# EAGLE board pannel (EAGLE 6.6.0)
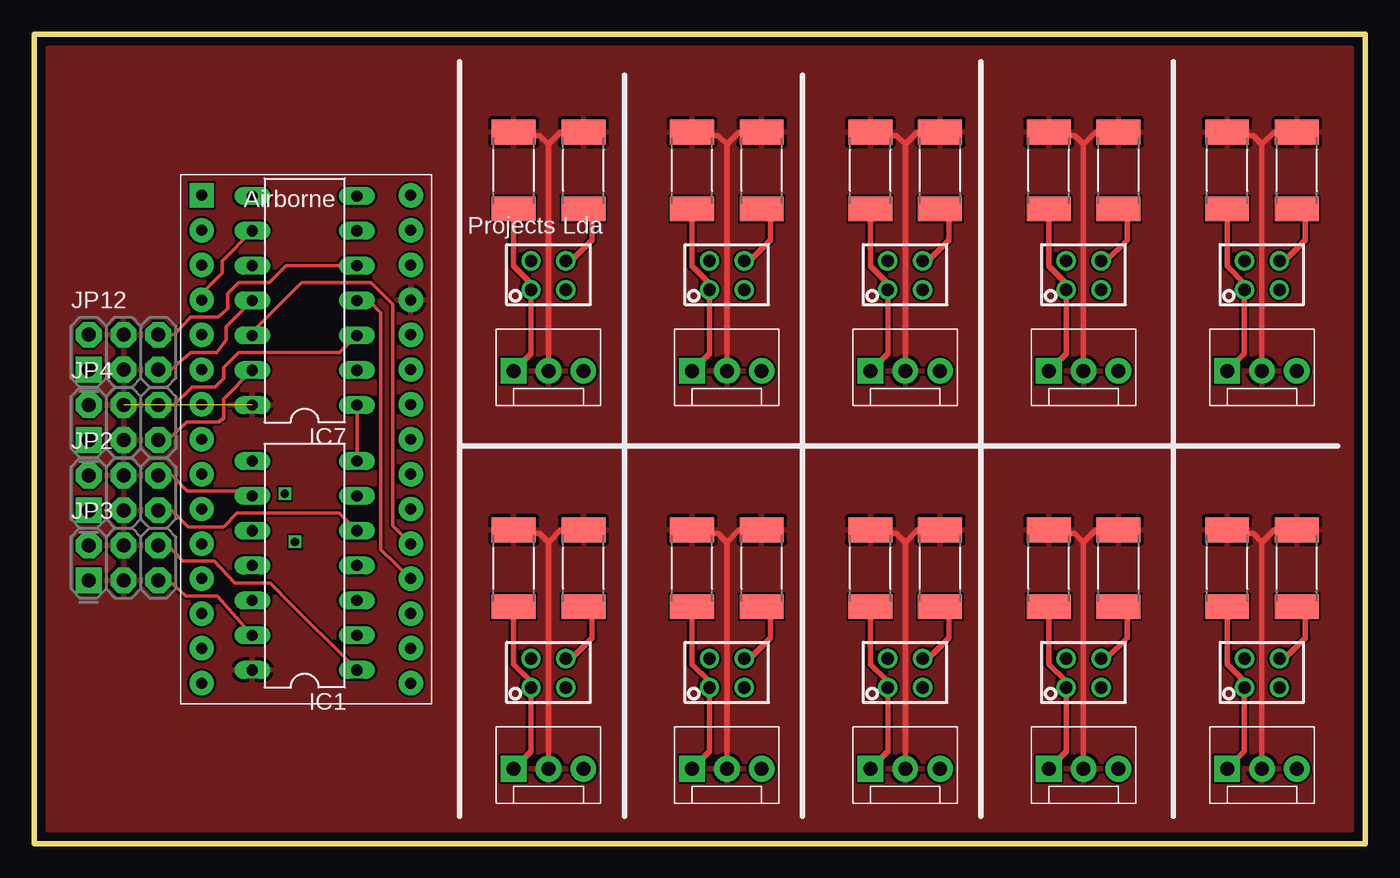
[diagram p0: board, top side]
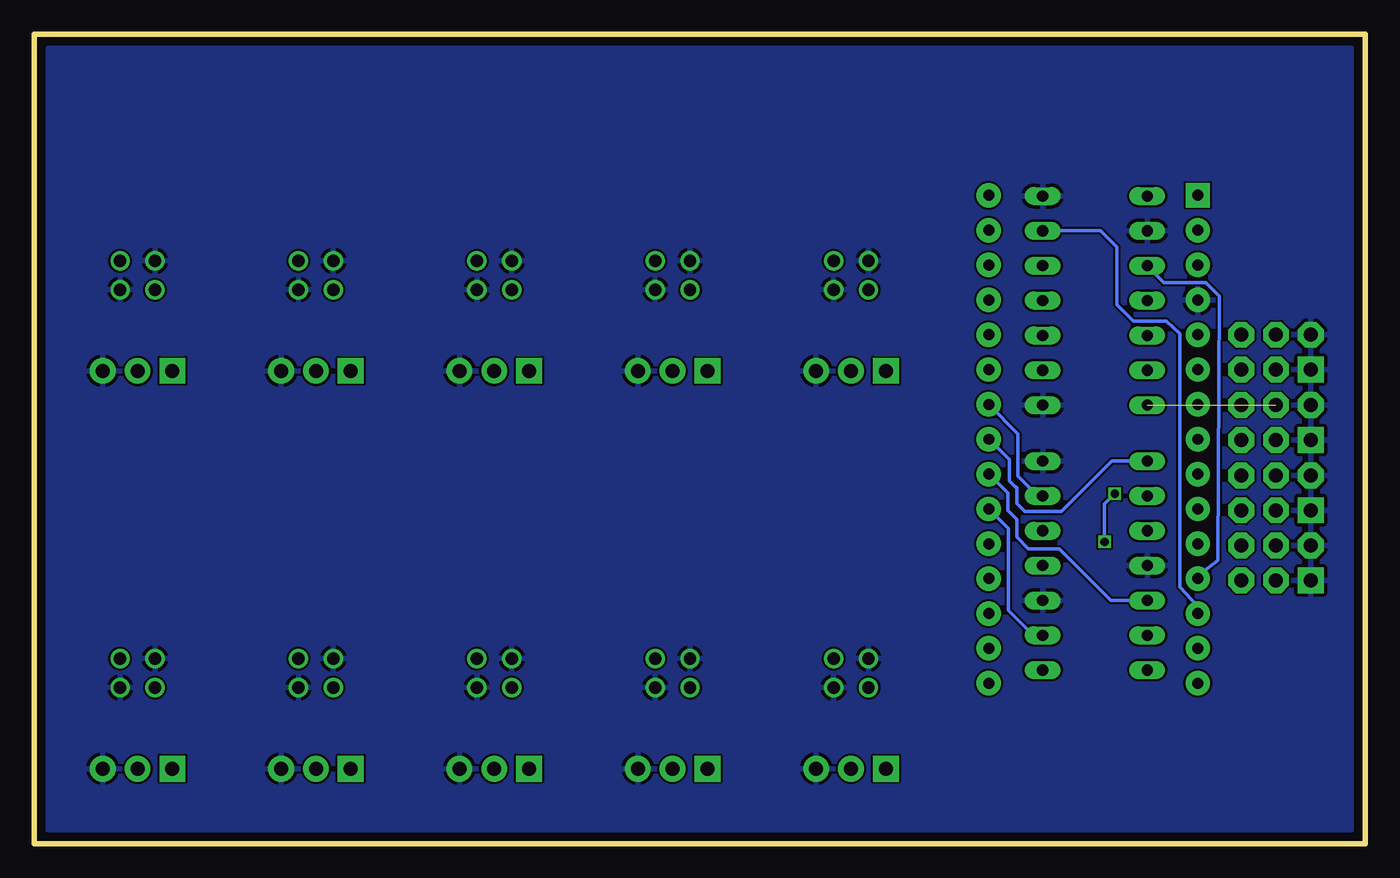
[diagram p1: board, bottom side, seen from below]

Size 97 x 59 mm. Coordinates in mm from the lower left corner, seen from the top.
Outline: 0,59 0,0 97,0 97,59 0,59
Copper layers (1*16): Top 0.035mm / dielectric 1.5mm / Bottom 0.035mm
Design rules "SeeedStudio_2layer_DRU_no_angle_20140221": minimum track width 6mil, minimum drill 12mil, track to track 6mil, track to pad 6mil, pad to pad 6mil, via to via 6mil, smd to smd 0mil, copper to edge 10mil, drill to drill 10mil, minimum pad ring 10mil, minimum via ring 6mil, stop-mask expansion 2mil, vias tented up to drill 100mil, thermal gap 10mil

## Footprints (pad centres in the part's own frame; a part is rotated, then mirrored left to right if it is on the bottom)
DIL14 = drill 0.813 long: 1 -7.62,-3.81; 2 -5.08,-3.81; 3 -2.54,-3.81; 4 0,-3.81; 5 2.54,-3.81; 6 5.08,-3.81; 7 7.62,-3.81; 8 7.62,3.81; 9 5.08,3.81; 10 2.54,3.81; 11 0,3.81; 12 -2.54,3.81; 13 -5.08,3.81; 14 -7.62,3.81
MOLEX-1X3 = drill 1.016 pad 1.88 square: 1 0,0 | drill 1.016 pad 1.88: 2 2.54,0; 3 5.08,0
2X3-NS = drill 1.016 pad 1.88 square: 1 -2.54,-1.27 | drill 1.016 pad 1.88 octagon: 2 -2.54,1.27; 3 0,-1.27; 4 0,1.27; 5 2.54,-1.27; 6 2.54,1.27
R2512 = smd 1.8 x 3.2: 1 -2.8,0; 2 2.8,0
QRD1114 = drill 0.9: 1 -1.067,1.27; 2 -1.067,-1.27; 3 1.041,-1.27; 4 1.041,1.27
PDIP-32 = drill 0.8 pad 1.778: 3V3 15.24,-35.56; +5V 15.24,-10.16; A0 15.24,-30.48; A1 15.24,-27.94; A2 15.24,-25.4; A3 15.24,-22.86; A4 15.24,-20.32; A5 15.24,-17.78; A6 15.24,-15.24; A7 15.24,-12.7; AREF 15.24,-33.02; D0/RX 0,-5.08; D2 0,-12.7; D3 0,-15.24; D4 0,-17.78; D5 0,-20.32; D6 0,-22.86; D7 0,-25.4; D8 0,-27.94; D9 0,-30.48; D10 0,-33.02; D11 0,-35.56; D12 0,-38.1; D13 15.24,-38.1; GND 0,-10.16; GND1 15.24,-5.08; RESET 0,-7.62; RESET1 15.24,-7.62; VIN 15.24,-2.54 | drill 0.8 pad 1.778 square: D1/TX 0,-2.54

## Placement (x,y rotation side)
IC1  7414N  [DIL14]  19.7,20.27 90 top
IC7  7414N  [DIL14]  19.7,39.59 90 top
JP1  [MOLEX-1X3]  34.94,5.46 0 top
JP2  [2X3-NS]  6.5,25.57 0 top
JP3  [2X3-NS]  6.5,20.46 0 top
JP4  [2X3-NS]  6.5,30.7 0 top
JP5  [MOLEX-1X3]  47.94,5.46 0 top
JP6  [MOLEX-1X3]  34.94,34.47 0 top
JP7  [MOLEX-1X3]  86.94,5.46 0 top
JP8  [MOLEX-1X3]  47.94,34.47 0 top
JP9  [MOLEX-1X3]  86.94,34.47 0 top
JP10  [MOLEX-1X3]  60.94,5.46 0 top
JP11  [MOLEX-1X3]  73.94,5.46 0 top
JP12  [2X3-NS]  6.5,35.83 0 top
JP13  [MOLEX-1X3]  60.94,34.47 0 top
JP14  [MOLEX-1X3]  73.94,34.47 0 top
R1  330  [R2512]  40.02,20.07 90 top
R2  10K  [R2512]  34.94,20.07 90 top
R3  330  [R2512]  53.02,20.07 90 top
R4  10K  [R2512]  47.94,20.07 90 top
R5  330  [R2512]  40.02,49.07 90 top
R6  10K  [R2512]  34.94,49.07 90 top
R7  330  [R2512]  92.02,20.07 90 top
R8  10K  [R2512]  86.94,20.07 90 top
R9  330  [R2512]  53.02,49.07 90 top
R10  10K  [R2512]  47.94,49.07 90 top
R11  330  [R2512]  92.02,49.07 90 top
R12  10K  [R2512]  86.94,49.07 90 top
R13  330  [R2512]  66.02,20.07 90 top
R14  10K  [R2512]  60.94,20.07 90 top
R15  330  [R2512]  79.02,20.07 90 top
R16  10K  [R2512]  73.94,20.07 90 top
R17  330  [R2512]  66.02,49.07 90 top
R18  10K  [R2512]  60.94,49.07 90 top
R19  330  [R2512]  79.02,49.07 90 top
R20  10K  [R2512]  73.94,49.07 90 top
U$1  QRD1114  [QRD1114]  37.48,12.45 90 top
U$2  ARDUINONANO  [PDIP-32]  12.2,49.8 0 top
U$3  QRD1114  [QRD1114]  50.48,12.45 90 top
U$4  QRD1114  [QRD1114]  37.48,41.45 90 top
U$5  QRD1114  [QRD1114]  89.47,12.45 90 top
U$6  QRD1114  [QRD1114]  50.48,41.45 90 top
U$7  QRD1114  [QRD1114]  89.47,41.45 90 top
U$8  QRD1114  [QRD1114]  63.47,12.45 90 top
U$9  QRD1114  [QRD1114]  76.47,12.45 90 top
U$10  QRD1114  [QRD1114]  63.47,41.45 90 top
U$11  QRD1114  [QRD1114]  76.47,41.45 90 top

## Library data of the parts
IC1 IC7 = 74xx-us
JP1-JP14 = SparkFun-Connectors
R1-R20 = resistor
U$1 U$3-U$11 = SparkFun-Sensors
U$2 = jet-lib

## Nets
5V: IC1.14 IC7.14 JP1.2 JP2.3 JP2.4 JP3.3 JP3.4 JP4.3 JP4.4 JP5.2 JP6.2 JP7.2 JP8.2 JP9.2 JP10.2 JP11.2 JP12.3 JP12.4 JP13.2 JP14.2 R1.2 R2.2 R3.2 R4.2 R5.2 R6.2 R7.2 R8.2 R9.2 R10.2 R11.2 R12.2 R13.2 R14.2 R15.2 R16.2 R17.2 R18.2 R19.2 R20.2 U$2.+5V
GND: IC1.3 IC1.7 IC1.11 IC7.1 IC7.7 IC7.9 JP1.3 JP2.1 JP2.2 JP3.1 JP3.2 JP4.1 JP4.2 JP5.3 JP6.3 JP7.3 JP8.3 JP9.3 JP10.3 JP11.3 JP12.1 JP12.2 JP13.3 JP14.3 U$1.2 U$1.4 U$2.GND U$3.2 U$3.4 U$4.2 U$4.4 U$5.2 U$5.4 U$6.2 U$6.4 U$7.2 U$7.4 U$8.2 U$8.4 U$9.2 U$9.4 U$10.2 U$10.4 U$11.2 U$11.4
N$1: R1.1 U$1.3
N$2: R3.1 U$3.3
N$3: R5.1 U$4.3
N$4: R7.1 U$5.3
N$5: R9.1 U$6.3
N$6: R11.1 U$7.3
N$7: R13.1 U$8.3
N$8: R15.1 U$9.3
N$9: R17.1 U$10.3
N$10: R19.1 U$11.3
RPM1: IC7.4 U$2.A0
RPM2: IC7.12 U$2.A1
RPM3: IC1.2 U$2.A2
RPM4: IC1.12 U$2.A3
RPM5: IC1.8 U$2.A4
RPM6: IC1.6 U$2.A5
RPM7: IC7.10 U$2.D9
RPM8: IC7.6 U$2.D10
SENSE1: IC7.3 JP4.6
SENSE2: IC7.13 JP4.5
SENSE3: IC1.1 JP3.6
SENSE4: IC1.13 JP3.5
SENSE5: IC1.9 JP2.6
SENSE6: IC1.5 JP2.5
SENSE7: IC7.11 JP12.5
SENSE8: IC7.5 JP12.6
SIGNAL: JP1.1 R2.1 U$1.1
SIGNAL1: JP5.1 R4.1 U$3.1
SIGNAL2: JP6.1 R6.1 U$4.1
SIGNAL3: JP7.1 R8.1 U$5.1
SIGNAL4: JP8.1 R10.1 U$6.1
SIGNAL5: JP9.1 R12.1 U$7.1
SIGNAL6: JP10.1 R14.1 U$8.1
SIGNAL7: JP11.1 R16.1 U$9.1
SIGNAL8: JP13.1 R18.1 U$10.1
SIGNAL9: JP14.1 R20.1 U$11.1

## Tracks (layer width: path | path; a pad name or v marks a point on that pad's centre or on a via)
5V  (1 unrouted)
  Top 0.406: JP1.2 37.48,21.98 | R2.2 35.2,22.61 36.84,22.61 37.48,21.98 | R1.2 38.37,22.87 37.48,21.98 | JP13.2 63.47,50.98 | R18.2 61.2,51.61 62.84,51.61 63.47,50.98 | R17.2 64.37,51.87 63.47,50.98 | JP6.2 37.48,50.98 | R6.2 35.2,51.61 36.84,51.61 37.48,50.98 | R5.2 38.37,51.87 37.48,50.98 | JP8.2 50.48,50.98 | R10.2 48.2,51.61 49.84,51.61 50.48,50.98 | R9.2 51.37,51.87 50.48,50.98 | JP14.2 76.47,50.98 | R20.2 74.19,51.61 75.84,51.61 76.47,50.98 | R19.2 77.37,51.87 76.47,50.98 | JP9.2 89.47,50.98 | R12.2 87.19,51.61 88.84,51.61 89.47,50.98 | R11.2 90.37,51.87 89.47,50.98 | JP7.2 89.47,21.98 | R8.2 87.19,22.61 88.84,22.61 89.47,21.98 | R7.2 90.37,22.87 89.47,21.98 | JP11.2 76.47,21.98 | R16.2 74.19,22.61 75.84,22.61 76.47,21.98 | R15.2 77.37,22.87 76.47,21.98 | JP10.2 63.47,21.98 | R14.2 61.2,22.61 62.84,22.61 63.47,21.98 | R13.2 64.37,22.87 63.47,21.98 | JP5.2 50.48,21.98 | R4.2 48.2,22.61 49.84,22.61 50.48,21.98 | R3.2 51.37,22.87 50.48,21.98
  pour Top: 1,58 1,1 96,1 96,57 96,58
+5V  (via drill 0.6)
  Bottom 0.254: v19,22 19,24.75 v18.25,25.5
GND
  Top 0.254: IC1.7 IC7.1 | U$2.GND 12.2,40.1 13.7,41.6 13.7,42.48 IC7.9
  pour Bottom: 1,57 1,1 96,1 96,58 1,58
N$1
  Top 0.406: U$1.3 39.15,13.49 40.65,14.99 40.65,16.63 R1.1
N$2
  Top 0.406: U$3.3 52.15,13.49 53.65,14.99 53.65,16.63 R3.1
N$3
  Top 0.406: U$4.3 39.15,42.49 40.65,43.99 40.65,45.63 R5.1
N$4
  Top 0.406: U$5.3 91.15,13.49 92.65,14.99 92.65,16.63 R7.1
N$5
  Top 0.406: U$6.3 52.15,42.49 53.65,43.99 53.65,45.63 R9.1
N$6
  Top 0.406: U$7.3 91.15,42.49 92.65,43.99 92.65,45.63 R11.1
N$7
  Top 0.406: U$8.3 65.15,13.49 66.65,14.99 66.65,16.63 R13.1
N$8
  Top 0.406: U$9.3 78.15,13.49 79.65,14.99 79.65,16.63 R15.1
N$9
  Top 0.406: U$10.3 65.15,42.49 66.65,43.99 66.65,45.63 R17.1
N$10
  Top 0.406: U$11.3 78.15,42.49 79.65,43.99 79.65,45.63 R19.1
RPM1
  Top 0.254: IC7.4 24.41,39.59 25.25,38.7 25.25,21.46 U$2.A0
RPM2
  Top 0.254: IC7.12 15.89,37.29 19.5,40.9 24.55,40.9 26.1,39.35 26.1,23.2 U$2.A1
RPM3
  Bottom 0.254: IC1.2 24.19,15.19 26,17 26,22.96 U$2.A2
RPM4
  Bottom 0.254: IC1.12 18.53,17.73 22.3,21.5 24.55,21.5 25.4,22.35 25.4,23.65 26.05,24.3 26.05,25.55 U$2.A3
RPM5
  Bottom 0.254: IC1.8 18.46,27.89 22.15,24.2 24.8,24.2 25.4,24.8 25.4,25.95 25.45,26 25.5,26 25.95,26.45 25.95,27.99 U$2.A4
RPM6
  Bottom 0.254: IC1.6 23.85,25.35 25.3,26.8 25.3,29.88 U$2.A5
RPM7
  Bottom 0.254: U$2.D9 12.2,19.5 10.75,20.65 10.65,39.9 11.6,40.9 14.66,40.9 IC7.10
RPM8
  Bottom 0.254: U$2.D10 12.2,17.3 13.5,18.7 13.5,37.2 14.5,38.1 16.9,38.1 18.1,39.3 18.1,43.5 19.3,44.7 23.48,44.7 IC7.6
SENSE1
  Top 0.254: JP4.6 10.17,31.97 11.5,33.3 13.2,33.3 13.8,33.9 13.8,34.7 14.9,35.8 22.26,35.8 IC7.3
SENSE2
  Top 0.254: JP4.5 9.73,29.43 11.1,30.75 13.4,30.75 13.8,31 13.8,32.42 IC7.13
SENSE3
  Top 0.254: JP3.6 9.77,21.73 10.8,20.6 13.1,20.6 14.6,19 17.2,19 18,18.2 18,18.16 IC1.1
SENSE4
  Top 0.254: JP3.5 9.8,19.2 11.05,18.05 13.33,18.05 IC1.13
SENSE5
  Top 0.254: JP2.6 10.06,26.84 11.15,25.7 15.64,25.7 IC1.9
SENSE6
  Top 0.254: JP2.5 10,24.3 11.2,23.1 13.8,23.1 14.8,24.1 22.22,24.1 IC1.5
SENSE7
  Top 0.254: JP12.5 9.96,34.56 11.4,35.8 13.3,35.8 14,36.7 14,37.7 IC7.11
SENSE8
  Top 0.254: JP12.6 10.2,37.1 11.4,38.4 13.4,38.4 14.1,39 14.1,40.1 14.9,40.9 17.1,40.9 18.35,42.15 23.49,42.15 IC7.5
SIGNAL
  Top 0.406: JP1.1 36.2,6.73 U$1.1 36.2,11.82 34.94,13.09 R2.1
SIGNAL1
  Top 0.406: JP5.1 49.2,6.73 U$3.1 49.2,11.82 47.94,13.09 R4.1
SIGNAL2
  Top 0.406: JP6.1 36.2,35.73 U$4.1 36.2,40.81 34.94,42.09 R6.1
SIGNAL3
  Top 0.406: JP7.1 88.2,6.73 U$5.1 88.2,11.82 86.94,13.09 R8.1
SIGNAL4
  Top 0.406: JP8.1 49.2,35.73 U$6.1 49.2,40.81 47.94,42.09 R10.1
SIGNAL5
  Top 0.406: JP9.1 88.2,35.73 U$7.1 88.2,40.81 86.94,42.09 R12.1
SIGNAL6
  Top 0.406: JP10.1 62.2,6.73 U$8.1 62.2,11.82 60.94,13.09 R14.1
SIGNAL7
  Top 0.406: JP11.1 75.2,6.73 U$9.1 75.2,11.82 73.94,13.09 R16.1
SIGNAL8
  Top 0.406: JP13.1 62.2,35.73 U$10.1 62.2,40.81 60.94,42.09 R18.1
SIGNAL9
  Top 0.406: JP14.1 75.2,35.73 U$11.1 75.2,40.81 73.94,42.09 R20.1